# Altium PCB AMR1.PcbDoc
Units mm, origin at the board's own origin, x right, y up, seen from the top; angles counter-clockwise.
Board outline 99.57 x 85.22 mm, 2 copper layers (Top Layer, Bottom Layer); 12 components, 26 nets, 92 pads, 10 vias.
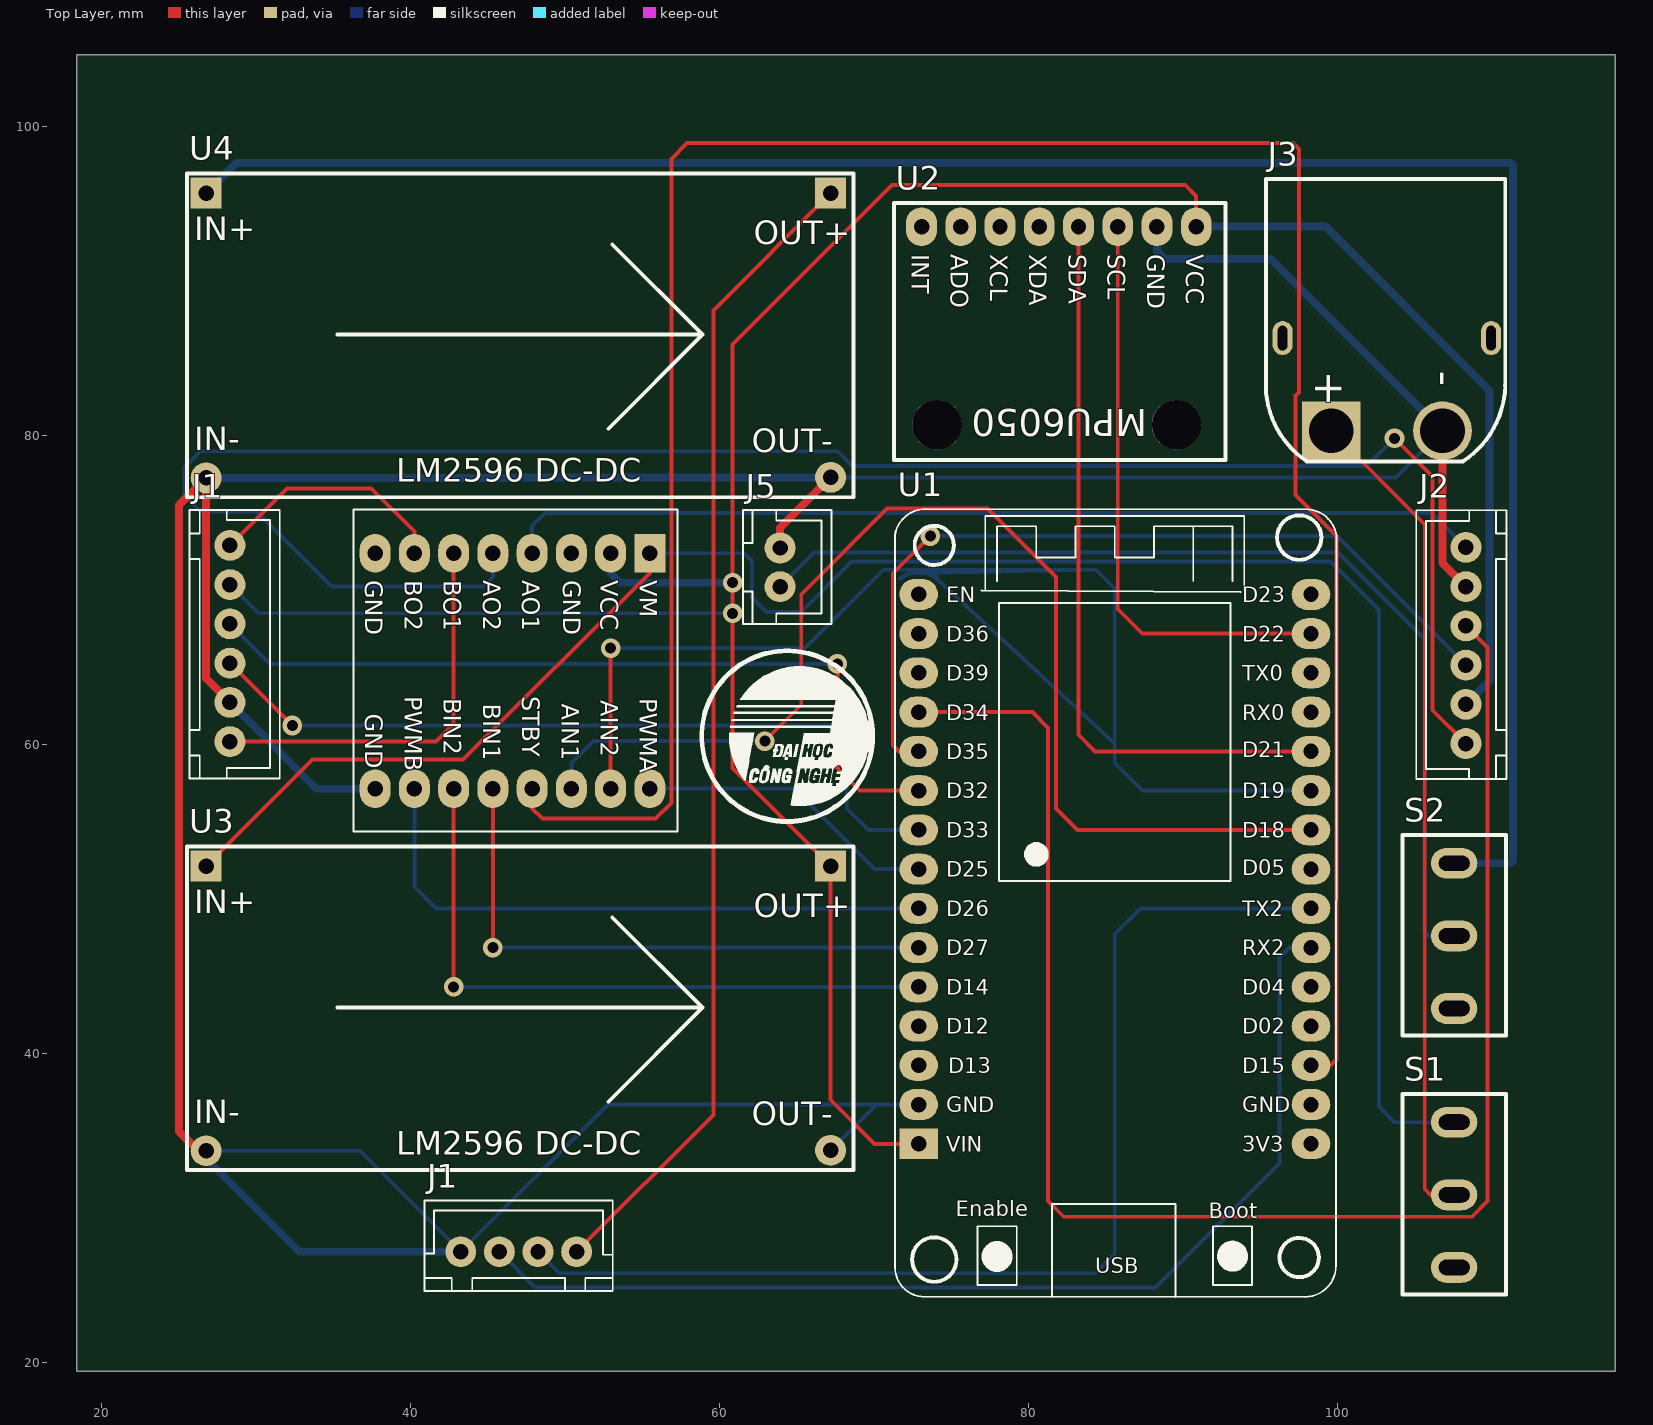
[diagram p0: Top Layer view]
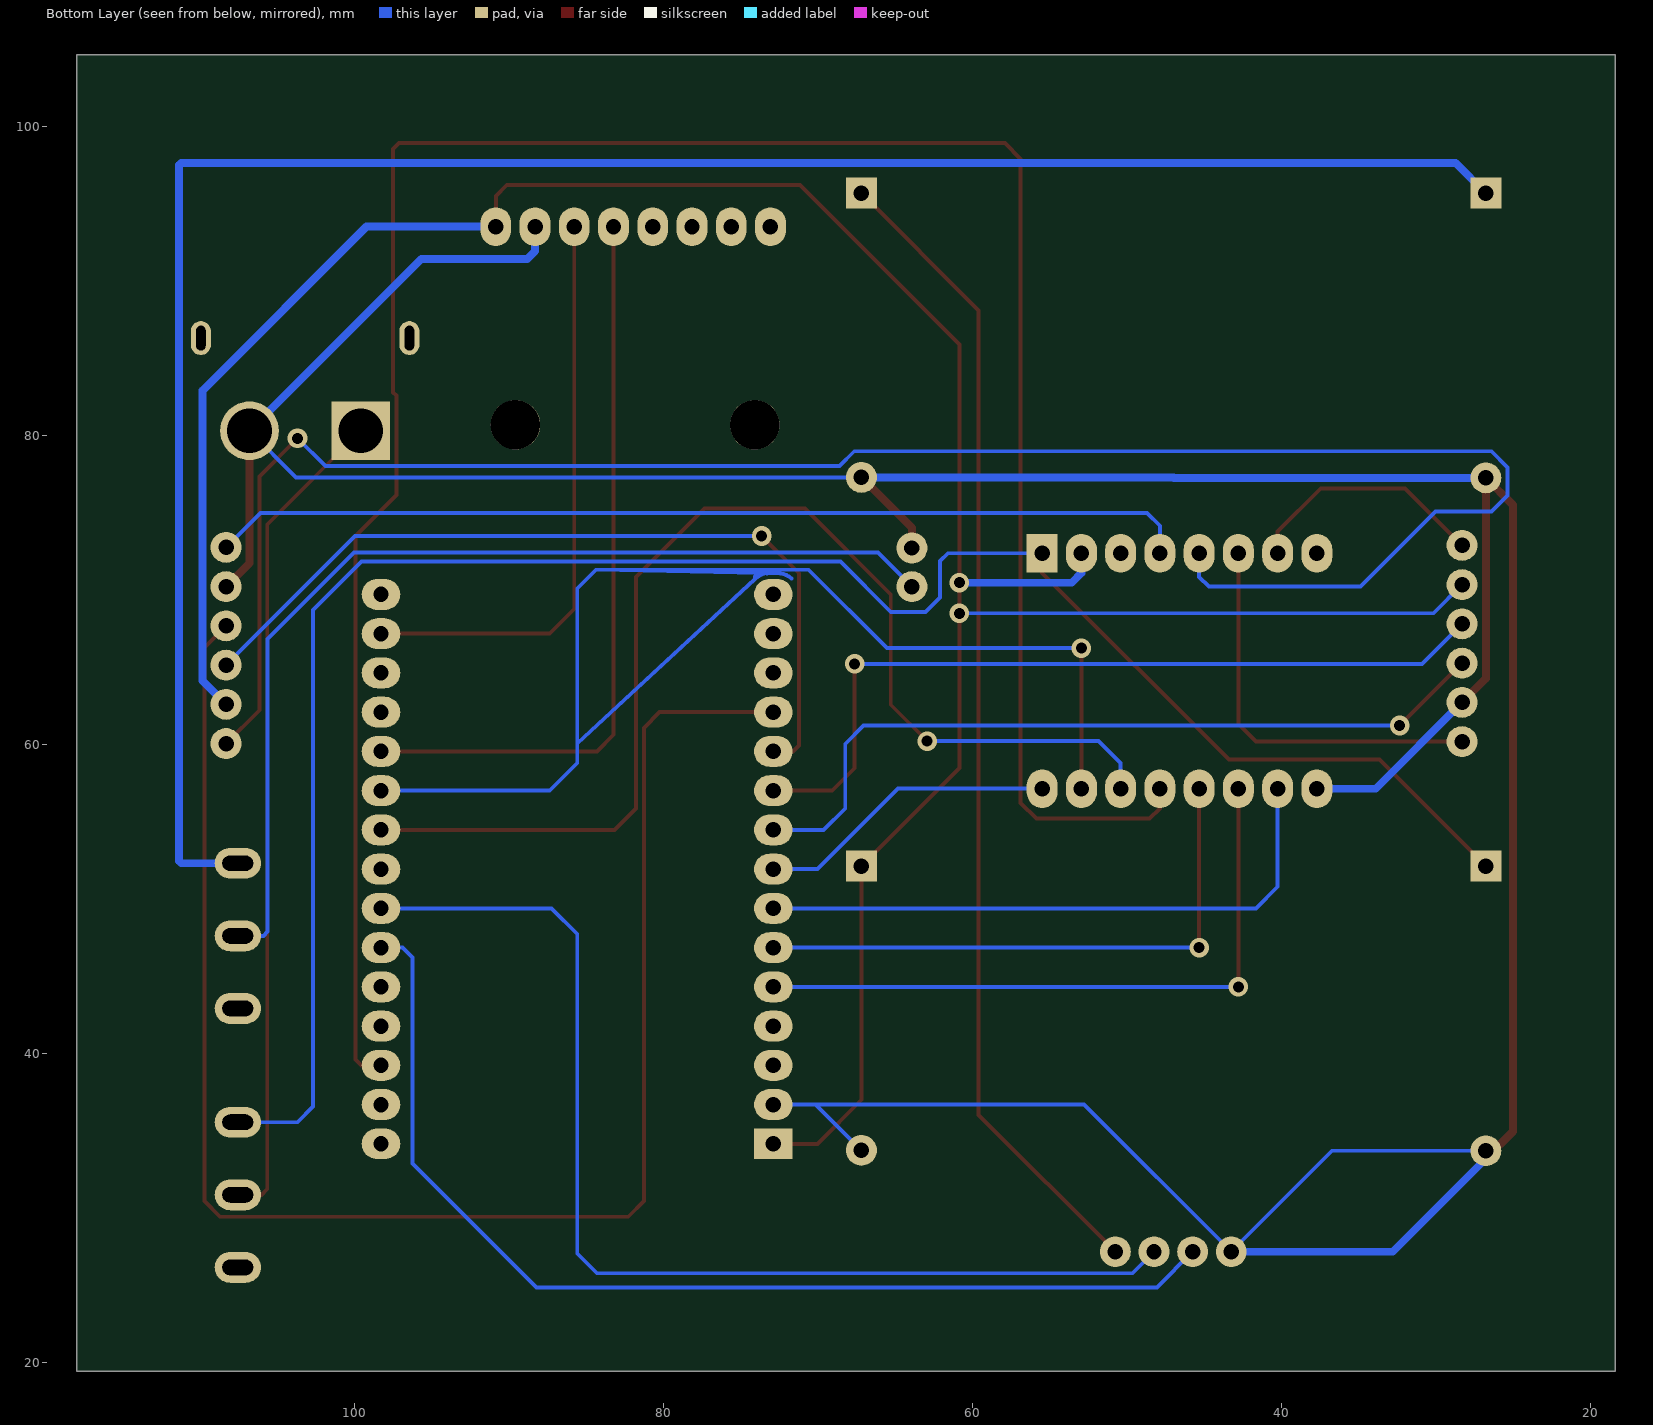
[diagram p1: Bottom Layer view, seen from below]
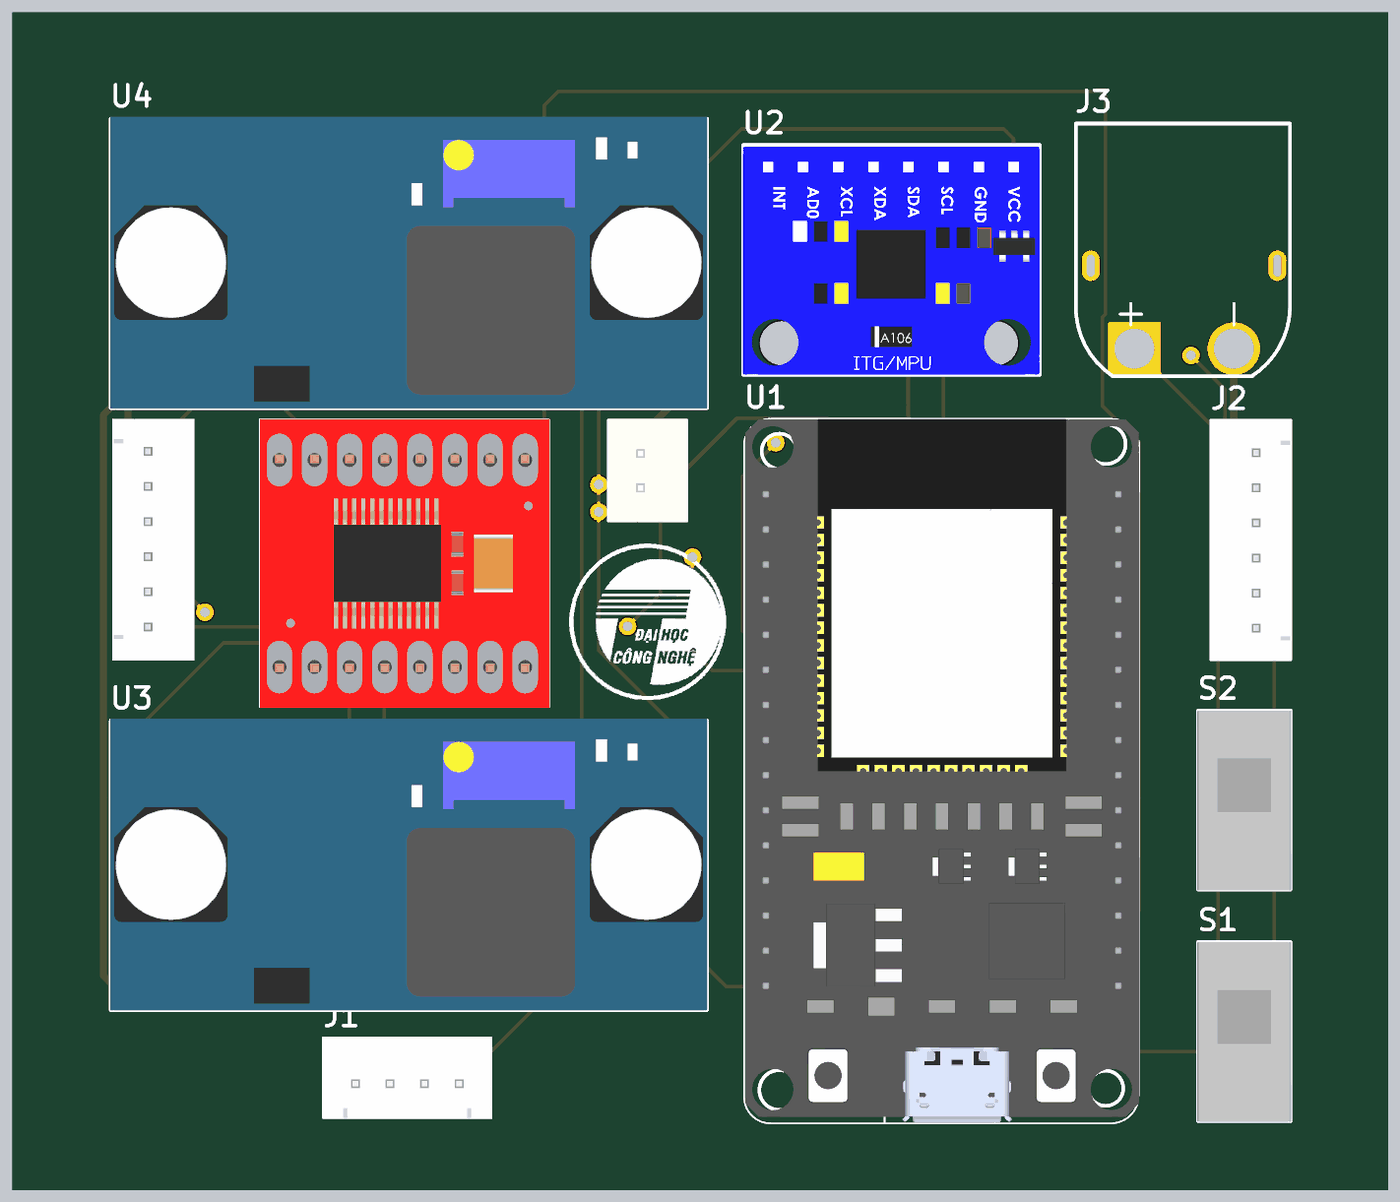
[diagram p2: 3D render of the assembled board from above, using the file's embedded part models]

## Layer stack, top to bottom
Top Solder: solder mask 0.0102, Solder Resist, Dk 3.5
Top Layer: signal copper 0.0356
Dielectric 1: dielectric 0.32, FR-4, Dk 4.8
Bottom Layer: signal copper 0.0356
Bottom Solder: solder mask 0.0102, Solder Resist, Dk 3.5

## Board outline
18.415,19.431 18.415,104.648 117.983,104.648 117.983,19.431

## Design rules (kind name [scope] priority, off if disabled: settings)
Clearance [All] p1: gap=0.254 ignorepadtopadclearanceinfootprint=FALSE
PolygonConnect [All] p1: connectstyle=Relief reliefconductorwidth=0.254 reliefentries=4 polygonreliefangle="90 Angle" airgapwidth=0.254
RoutingVias [All] p1: holewidth=0.711 width=1.27 viastyle="Through Hole" minholewidth=0.711 minwidth=1.27 maxholewidth=0.711 maxwidth=1.27
SolderMaskExpansion [All] p1: expansion=0.102 istentingtop=FALSE
Width [All] p1: maxlimit=0.254 minlimit=0.254 preferedwidth=0.254
30 further rules are at their usual default settings.

## Classes and differential pairs
component class AMR1: J1 J2 J3 J5 S1 S2

## Components (designator, comment, footprint, x,y, rotation, side; value= is the part's Value field where it differs from the comment)
J1 "JST-2.54-4P" JST-2.54-4P 47,27.563 r270 top
J1 "JST-2.54-6P" JST-2.54-6P 28.619,66.491 r180 top
J2 "JST-2.54-6P" JST-2.54-6P 108.033,66.478 r0 top
J3 "XT-60PW" XT-60PW-Female 103.124,87.503 r270 top
J5 "JST-2.54-2P" JST-2.54-2P 64.389,71.501 r180 top
S1 "SS12D10" SS12D10 107.569,30.86 r90 top
S2 "SS12D10" SS12D10 107.569,47.624 r90 top
U1 "ESP32_30" ESP32_30 85.598,51.943 r0 top
U2 "MPU6050" MPU6050 82.042,86.741 r180 top
U3 "MODULE_LM2596" MODULE_LM2596 46.99,42.926 r0 top
U4 "MODULE_LM2596" MODULE_LM2596 46.99,86.487 r0 top
? "MODULE_TB6612FNG" MODULE_TB6612FNG 46.609,64.77 r270 top

## Footprints (in the part's own frame and the unit in brackets; to place one, negate y for a bottom-side part, rotate by r counter-clockwise, add the part's x,y. Pads: shape width x height; smd on the part's side, far side on the other; paste and mask are expansions set on the pad)
ESP32_30 [mm] "Microcontoller Board 30 Pins Wifi 2.4GHz BLE 4.2 ESP32-WROOM-32D"
  oval 2.5x2 hole 1: 1(-12.7,17.78) 2(-12.7,15.24) 3(-12.7,12.7) 4(-12.7,10.16) 5(-12.7,7.62) 6(-12.7,5.08) 7(-12.7,2.54) 8(-12.7,0) 9(-12.7,-2.54) 10(-12.7,-5.08) 11(-12.7,-7.62) 12(-12.7,-10.16) 13(-12.7,-12.7) 14(-12.7,-15.24) 16(12.7,17.78) 17(12.7,15.24) 18(12.7,12.7) 19(12.7,10.16) 20(12.7,7.62) 21(12.7,5.08) 22(12.7,2.54) 23(12.7,0) 24(12.7,-2.54) 25(12.7,-5.08) 26(12.7,-7.62) 27(12.7,-10.16) 28(12.7,-12.7) 29(12.7,-15.24) 30(12.7,-17.78)
  rect 2.5x2 hole 1: 15(-12.7,-17.78)
  silkscreen extent -14.23,-27.69 14.35,23.31, body extent -14.15,-27.61 14.35,23.29, height 7
JST-2.54-2P [mm]
  round 2 hole 1: 1(0.459,1.27) 2(0.459,-1.23)
  silkscreen extent -2.87,-3.68 2.87,3.68, body extent -2.87,-3.68 2.88,3.72, height 7.05
JST-2.54-4P [mm]
  round 2 hole 1: 1(0.385,3.76) 2(0.385,1.26) 3(0.385,-1.24) 4(0.385,-3.74)
  silkscreen extent -2.92,-6.1 2.92,6.1, body extent -2.92,-6.09 2.92,6.09, height 7.21
JST-2.54-6P [mm]
  round 2 hole 1: 1(0.298,6.293) 2(0.298,3.753) 3(0.298,1.213) 4(0.298,-1.327) 5(0.298,-3.867) 6(0.298,-6.407)
  silkscreen extent -2.92,-8.69 2.92,8.69, body extent -2.97,-8.73 2.87,8.64, height 7.23
MODULE_LM2596 [mm] "MODULE BUCK STEP DOWN 3A 43x20mm"
  round 2 hole 1: 1(20.21,-9.185) 4(-20.21,-9.215)
  rect 2x2 hole 1: 2(20.21,9.215) 3(-20.21,9.215)
  silkscreen extent -21.45,-10.47 21.7,10.49, body extent -21.49,-10.49 21.71,10.61, height 13.15
MODULE_TB6612FNG [mm] "Module Dual Motor Driver 2.5-13.5V 3.2A Peak 21x18mm"
  rect 2.5x2 hole 1: 1(-7.62,8.89)
  oval 2.5x2 hole 1: 2(-7.62,6.35) 3(-7.62,3.81) 4(-7.62,1.27) 5(-7.62,-1.27) 6(-7.62,-3.81) 7(-7.62,-6.35) 8(-7.62,-8.89) 9(7.62,-8.89) 10(7.62,-6.35) 11(7.62,-3.81) 12(7.62,-1.27) 13(7.62,1.27) 14(7.62,3.81) 15(7.62,6.35) 16(7.62,8.89)
  silkscreen extent -10.44,-10.28 10.39,10.67, body extent -10.45,-10.28 10.45,10.7, height 6.12
MPU6050 [mm] "IMU ACCEL/GYRO 3-AXIS I2C"
  oval 2x2.5 hole 1: 1(-8.826,-6.794) 2(-6.286,-6.794) 3(-3.746,-6.794) 4(-1.206,-6.794) 5(1.334,-6.794) 6(3.874,-6.794) 7(6.414,-6.794) 8(8.954,-6.794)
  round 3.2 hole 3.2 unplated: ""(-7.557,6.033) ""(7.937,6.033)
  silkscreen extent -10.73,-8.32 10.73,8.32, body extent -10.73,-8.19 10.77,8.31, height 5.69
SS12D10 [mm]
  oval 2x3 hole 1 slot 2 at 90 deg: 1(-4.7,0) 2(0,0) 3(4.7,0)
  silkscreen extent -6.44,-3.35 6.52,3.35, body extent -6.5,-3.4 6.5,3.4, height 18.4
XT-60PW-Female [mm]
  rect 3.8x3.8 hole 2.9 paste-2539.97 mask+0.05: 1(7.184,-3.515)
  round 3.8 hole 2.9 paste-2539.97 mask+0.05: 2(7.184,3.685)
  oval 2.2x1.3 hole 0.6 slot 1.6 at 0 deg paste-2539.97 mask+0.05: ""(1.184,6.835) ""(1.184,-6.665)
  silkscreen extent -9.1,-7.75 9.18,7.75, body extent -9.21,-7.66 9.19,7.84, height 8.65

## Part data
J1: "Female Connector JST 4 Vias, 2.54mm."
J1 J2: "Female Connector JST 6 Vias, 2.54mm."
J3: "Power Connector XT-60PW, Male and Female.", JLCPCB PN F=C9900000737, JLCPCB PN M=C98732
J5: "Female Connector JST 2 Vias, 2.54mm."
S1 S2: "Vertical Slide Switch 3 Pins 6.7x12.7x6.4mm.", JLCPCB PN=C2887259
U1: "Microcontoller Board 30 Pins Wifi 2.4GHz BLE 4.2 ESP32-WROOM-32D", ComponentLink1Description=Datasheet, ComponentLink1URL=https://www.mouser.com/datasheet/2/891/esp32_wroom_32d_esp32_wroom_32u_datasheet_en-1365844.pdf
U2: "IMU ACCEL/GYRO 3-AXIS I2C", ComponentLink1Description=Datasheet, ComponentLink1URL=https://invensense.tdk.com/wp-content/uploads/2015/02/MPU-6000-Datasheet1.pdf
U3 U4: "MODULE BUCK STEP DOWN 3A 43x20mm", ComponentLink1Description=Datasheet, ComponentLink1URL=https://www.ti.com/lit/ds/symlink/lm2596.pdf
?: "Module Dual Motor Driver 2.5-13.5V 3.2A Peak 21x18mm", ComponentLink1Description=Datasheet, ComponentLink1URL=https://www.mouser.com/datasheet/2/408/TB6612FNG_datasheet_en_20141001-708260.pdf

## Via types
v1: diameter 1.27, hole 0.711, Top Layer to Bottom Layer, 10 vias

## Nets (pads, with @x,y where several pads share a name; then routed paths per layer and width w, separated by ;. In a path a pad name is that pad's centre, name@x,y a point inside that pad or via, vN(x,y) a via of type N, cw(c..) or ccw(c..) an arc to the next point about the centre after c; other vN are vias at no path point)
5V: ?.2 J1.5 J2.5 U1.15 U2.1 U3.2 | length 182
  Top Layer w0.254: U1.15 70.053,34.163 67.2,37.016 U3.2 60.858,58.483 v1(60.858,68.504) v1(60.858,70.485) 60.858,85.903 71.171,96.215 90.157,96.215 90.868,95.504 U2.1
  Bottom Layer w0.254: J1.5 30.175,68.504 v1(60.858,68.504) ; 52.959,71.12 ?.2
  Bottom Layer w0.508: 52.959,71.12 53.594,70.485 v1(60.858,70.485) ; U2.1 99.238,93.535 109.855,82.918 109.855,64.135 J2.5
"5V LIDAR": J1.1@50.76,27.178 U4.2 | length 75.3
  Top Layer w0.254: J1.1@50.76,27.178 59.614,36.032 59.614,88.116 U4.2
7.4V: J5.1 S2.2 | length 65.9
  Bottom Layer w0.254: J5.1 66.137,72.437 100.039,72.437 105.639,66.838 105.639,47.903 105.918,47.624 S2.2
7.4V_SW2: S2.3 U4.3 | length 134.4
  Bottom Layer w0.254: 111.23,52.324 111.379,52.473 ; 111.23,97.663 111.379,97.514
  Bottom Layer w0.508: U4.3 28.741,97.663 111.23,97.663 ; S2.3 111.23,52.324 ; 111.379,52.473 111.379,97.514
12V: J3.1 S1.2 | length 53.6
  Top Layer w0.254: J3.1 105.665,74.263 105.665,31.242 106.047,30.86 S1.2
12V_SW1: ?.1 S1.3 U3.3 | length 128.1
  Top Layer w0.254: U3.3 33.669,59.03 43.409,59.03 55.499,71.12 ?.1
  Bottom Layer w0.254: ?.1 61.595,72.39 62.103,71.882 62.103,69.52 63.043,68.58 65.303,68.58 68.566,71.843 99.556,71.843 102.692,68.707 102.692,36.576 103.708,35.56 S1.3
AIN1: ?.14 U1.22 | length 77.9
  Top Layer w0.254: v1(62.941,60.223) 65.303,62.586 65.303,69.723 70.866,75.286 77.368,75.286 81.788,70.866 81.788,55.88 83.185,54.483 U1.22
  Bottom Layer w0.254: ?.14 50.419,58.801 51.841,60.223 v1(62.941,60.223)
AIN2: ?.15 U1.21 | length 100.7
  Top Layer w0.254: ?.15 v1(52.959,66.243)
  Bottom Layer w0.254: v1(52.959,66.243) 65.548,66.243 70.628,71.323 72.644,71.323 ; 71.731,70.756 cw(c72.648,69.723) 72.644,71.104 ; 73.148,71.104 cw(c73.148,69.723) 73.151,71.104 ; U1.21 87.376,57.023 85.598,58.801 85.598,60.086 ; 72.644,71.104 cw(c72.648,69.723) 72.645,71.104 ; 72.644,71.104 72.644,71.323 ; 72.644,71.323 72.645,71.323 ; 72.645,71.104 cw(c72.648,69.723) 72.648,71.104 ; 72.645,71.104 72.648,71.104 ; 72.645,71.104 72.645,71.323 ; 72.645,71.323 72.648,71.323 ; 72.648,71.104 73.151,71.113 ; 72.648,71.104 72.648,71.323 ; 72.648,71.323 73.151,71.323 ; 73.151,71.104 cw(c73.148,69.723) 74.086,70.737 ; 73.151,71.104 73.151,71.113 ; 73.151,71.104 73.16,71.114 ; 73.151,71.113 73.16,71.114 ; 73.151,71.113 73.151,71.323 ; 73.151,71.323 73.37,71.323 ; 73.16,71.114 73.705,71.124 ; 73.16,71.114 73.37,71.323 ; 73.37,71.323 84.379,71.323 ; 73.37,71.323 73.705,71.124 ; 73.705,71.124 84.379,71.323 ; 73.705,71.124 74.086,70.897 74.086,70.737 ; 74.086,70.737 85.598,60.086 ; 84.379,71.323 85.598,70.104 85.598,60.086
BIN1: ?.12 U1.10 | length 37.8
  Top Layer w0.254: v1(45.339,46.863) ?.12
  Bottom Layer w0.254: v1(45.339,46.863) U1.10
BIN2: ?.11 U1.11 | length 42.9
  Top Layer w0.254: v1(42.799,44.323) ?.11
  Bottom Layer w0.254: v1(42.799,44.323) U1.11
C1A: J2.3 U1.4 | length 106.5
  Top Layer w0.254: U1.4 80.264,62.103 81.28,61.087 81.28,30.455 82.296,29.439 108.712,29.439 109.728,30.455 109.728,66.294 J2.3
C1B: J2.4 U1.5 | length 54.5
  Top Layer w0.254: U1.5 71.628,59.563 71.247,59.944 71.247,71.095 v1(73.66,73.508)
  Bottom Layer w0.254: v1(73.66,73.508) 99.974,73.508 J2.4
C2A: J1.3@28.321,65.278 U1.7 | length 51.5
  Top Layer w0.254: J1.3@28.321,65.278 v1(32.36,61.239)
  Bottom Layer w0.254: v1(32.36,61.239) 67.056,61.239 68.25,60.046 68.25,55.88 69.647,54.483 U1.7
C2B: J1.4@28.321,67.818 U1.6 | length 53
  Top Layer w0.254: v1(67.64,65.227) 67.64,58.471 69.088,57.023 U1.6
  Bottom Layer w0.254: J1.4@28.321,67.818 30.912,65.227 v1(67.64,65.227)
GND: ?.9 J1.2@28.321,62.738 J1.4@43.26,27.178 J2.2 J3.2 J5.2 U1.14 U2.2 U3.1 U3.4 U4.1 U4.4 | length 271.2
  Top Layer w0.508: U3.4@26.78,33.203 25.019,34.964 25.019,75.511 U4.4 26.78,64.279 J1.2@28.321,62.738 ; J5.2 63.93,74.032 U4.1 ; J3.2 106.809,71.753 J2.2
  Bottom Layer w0.254: U3.4 36.727,33.711 43.26,27.178 52.785,36.703 70.162,36.703 ; 46.965,77.272 46.995,77.302 ; U3.1 70.162,36.703 ; U4.1 103.793,77.302 J3.2 ; U1.14 70.162,36.703
  Bottom Layer w0.508: U3.4@26.78,33.203 32.805,27.178 J1.4@43.26,27.178 ; U4.4 46.965,77.272 ; J1.2@28.321,62.738 33.909,57.15 ?.9 ; 46.995,77.302 U4.1 ; U2.2 88.328,91.948 88.837,91.44 95.688,91.44 J3.2
M11: ?.4 J2.1 | length 63.5
  Bottom Layer w0.254: ?.4 47.879,74.168 48.717,75.006 106.096,75.006 J2.1
M12: ?.6 J1.1@28.321,60.198 | length 26
  Top Layer w0.254: J1.1@28.321,60.198 41.656,60.198 42.799,61.341 ?.6
M21: ?.5 J2.6 | length 127.6
  Top Layer w0.254: v1(103.708,79.832) 106.174,77.366 106.174,62.228 J2.6
  Bottom Layer w0.254: ?.5 45.339,70.866 44.704,70.231 34.9,70.231 30.048,75.082 26.416,75.082 25.375,76.124 25.375,77.953 26.416,78.994 67.666,78.994 68.631,78.029 101.905,78.029 v1(103.708,79.832)
M22: ?.7 J1.6 | length 16
  Top Layer w0.254: J1.6 32.004,76.581 37.465,76.581 40.259,73.787 ?.7
PWMA: ?.16 U1.8 | length 19.6
  Bottom Layer w0.254: ?.16 64.846,57.15 70.053,51.943 U1.8
PWMB: ?.10 U1.9 | length 39.6
  Bottom Layer w0.254: ?.10 40.259,50.8 41.656,49.403 U1.9
RX: J1.2@48.26,27.178 U1.24 | length 72.5
  Bottom Layer w0.254: J1.2@48.26,27.178 49.657,25.781 84.328,25.781 85.598,27.051 85.598,47.752 87.249,49.403 U1.24
SCL: U1.17 U2.3 | length 37.9
  Top Layer w0.254: U2.3 85.788,68.77 87.376,67.183 U1.17
SDA: U1.20 U2.4 | length 48.4
  Top Layer w0.254: U2.4 83.248,60.642 84.328,59.563 U1.20
STBY: ?.13 U1.28 | length 155.8
  Top Layer w0.254: ?.13 47.879,55.88 48.539,55.22 55.88,55.22 56.896,56.236 56.896,97.917 57.912,98.933 97.13,98.933 97.511,98.552 97.511,82.804 97.307,82.601 97.307,76.149 99.949,73.508 99.949,39.624 99.568,39.243 U1.28
TX: J1.3@45.76,27.178 U1.25 | length 70.4
  Bottom Layer w0.254: J1.3@45.76,27.178 48.072,24.867 88.24,24.867 96.266,32.893 96.266,46.228 96.901,46.863 U1.25
pads on no net: ?.3 ?.8 J3. S1.1 S2.1 U1.1 U1.2 U1.3 U1.12 U1.13 U1.16 U1.18 U1.19 U1.23 U1.26 U1.27 U1.29 U1.30 U2. U2.5 U2.6 U2.7 U2.8

## Silkscreen, mask and mechanical layers (free items; w line width, h text height)
Top Overlay:
  drawing of 11 lines, arcs and shapes, not listed

## Text inside footprints (layer, text, board x,y; h text height)
J3: Top Overlay "+" at 98.578,84.208 h2.03 r270; Top Overlay "-" at 106.029,84.208 h2.03 r270
U1: Top Overlay "Enable" at 75.311,29.464 h1; Top Overlay "Boot" at 91.694,29.337 h1; Top Overlay "USB" at 84.328,25.781 h1; Top Overlay "EN" at 74.676,69.215 h1; Top Overlay "D23" at 93.853,69.215 h1; Top Overlay "D36" at 74.676,66.675 h1; Top Overlay "TX2" at 93.853,48.895 h1; Top Overlay "RX2" at 93.853,46.355 h1; Top Overlay "D15" at 93.853,38.735 h1; Top Overlay "D02" at 93.853,41.275 h1; Top Overlay "GND" at 93.853,36.195 h1; Top Overlay "D04" at 93.853,43.815 h1; Top Overlay "3V3" at 93.853,33.655 h1; Top Overlay "D39" at 74.676,64.135 h1; Top Overlay "D12" at 74.676,41.275 h1; Top Overlay "VIN" at 74.676,33.655 h1; Top Overlay "GND" at 74.676,36.195 h1; Top Overlay "D14" at 74.676,43.815 h1; Top Overlay "D27" at 74.676,46.355 h1; Top Overlay "D13" at 74.803,38.735 h1; Top Overlay "D26" at 74.676,48.895 h1; Top Overlay "D32" at 74.676,56.515 h1; Top Overlay "D34" at 74.676,61.595 h1; Top Overlay "D35" at 74.676,59.055 h1; Top Overlay "D33" at 74.676,53.975 h1; Top Overlay "D25" at 74.676,51.435 h1; Top Overlay "D19" at 93.853,56.515 h1; Top Overlay "D05" at 93.853,51.562 h1; Top Overlay "D18" at 93.853,53.975 h1; Top Overlay "D21" at 93.853,59.182 h1; Top Overlay "D22" at 93.853,66.675 h1; Top Overlay "TX0" at 93.853,64.135 h1; Top Overlay "RX0" at 93.853,61.595 h1
U2: Top Overlay "INT" at 72.453,91.757 h1.14 r270; Top Overlay "VCC" at 90.233,91.757 h1.14 r270; Top Overlay "GND" at 87.694,91.757 h1.14 r270; Top Overlay "SCL" at 85.153,91.757 h1.14 r270; Top Overlay "SDA" at 82.614,91.757 h1.14 r270; Top Overlay "XDA" at 80.073,91.757 h1.14 r270; Top Overlay "XCL" at 77.534,91.757 h1.14 r270; Top Overlay "ADO" at 74.993,91.757 h1.14 r270
U3: Top Overlay "OUT-" at 62.086,35.362 h1.52; Top Overlay "IN+" at 26.018,49.078 h1.52; Top Overlay "IN-" at 26.018,35.489 h1.52; Top Overlay "OUT+" at 62.213,48.824 h1.52; Top Overlay "LM2596 DC-DC" at 39.099,33.457 h1.52
U4: Top Overlay "LM2596 DC-DC" at 39.099,77.018 h1.52; Top Overlay "OUT+" at 62.213,92.385 h1.52; Top Overlay "IN-" at 26.018,79.05 h1.52; Top Overlay "IN+" at 26.018,92.639 h1.52; Top Overlay "OUT-" at 62.086,78.923 h1.52
?: Top Overlay "STBY" at 47.244,63.144 h1.14 r270; Top Overlay "AIN1" at 49.784,62.636 h1.14 r270; Top Overlay "BIN2" at 42.164,63.017 h1.14 r270; Top Overlay "PWMB" at 39.624,63.144 h1.14 r270; Top Overlay "BIN1" at 44.704,62.636 h1.14 r270; Top Overlay "GND" at 37.084,62.001 h1.14 r270; Top Overlay "AIN2" at 52.324,62.89 h1.14 r270; Top Overlay "PWMA" at 54.864,63.017 h1.14 r270; Top Overlay "GND" at 49.911,70.637 h1.14 r270; Top Overlay "BO1" at 42.164,70.637 h1.14 r270; Top Overlay "BO2" at 39.624,70.637 h1.14 r270; Top Overlay "AO2" at 44.704,70.637 h1.14 r270; Top Overlay "AO1" at 47.244,70.637 h1.14 r270; Top Overlay "GND" at 37.084,70.637 h1.14 r270; Top Overlay "VCC" at 52.324,70.637 h1.14 r270; Top Overlay "VM" at 54.864,70.637 h1.14 r270